# Altium PCB superhet1.PcbDoc (part 2 of 5)
Units mm, origin at the board's own origin, x right, y up, seen from the top; angles counter-clockwise.
Board outline 77 x 100 mm, 4 copper layers (Top Layer, Internal Plane 1, Signal Layer 1, Bottom Layer), stack 0.778 mm thick; 440 components, 348 nets, 1672 pads, 2403 vias.
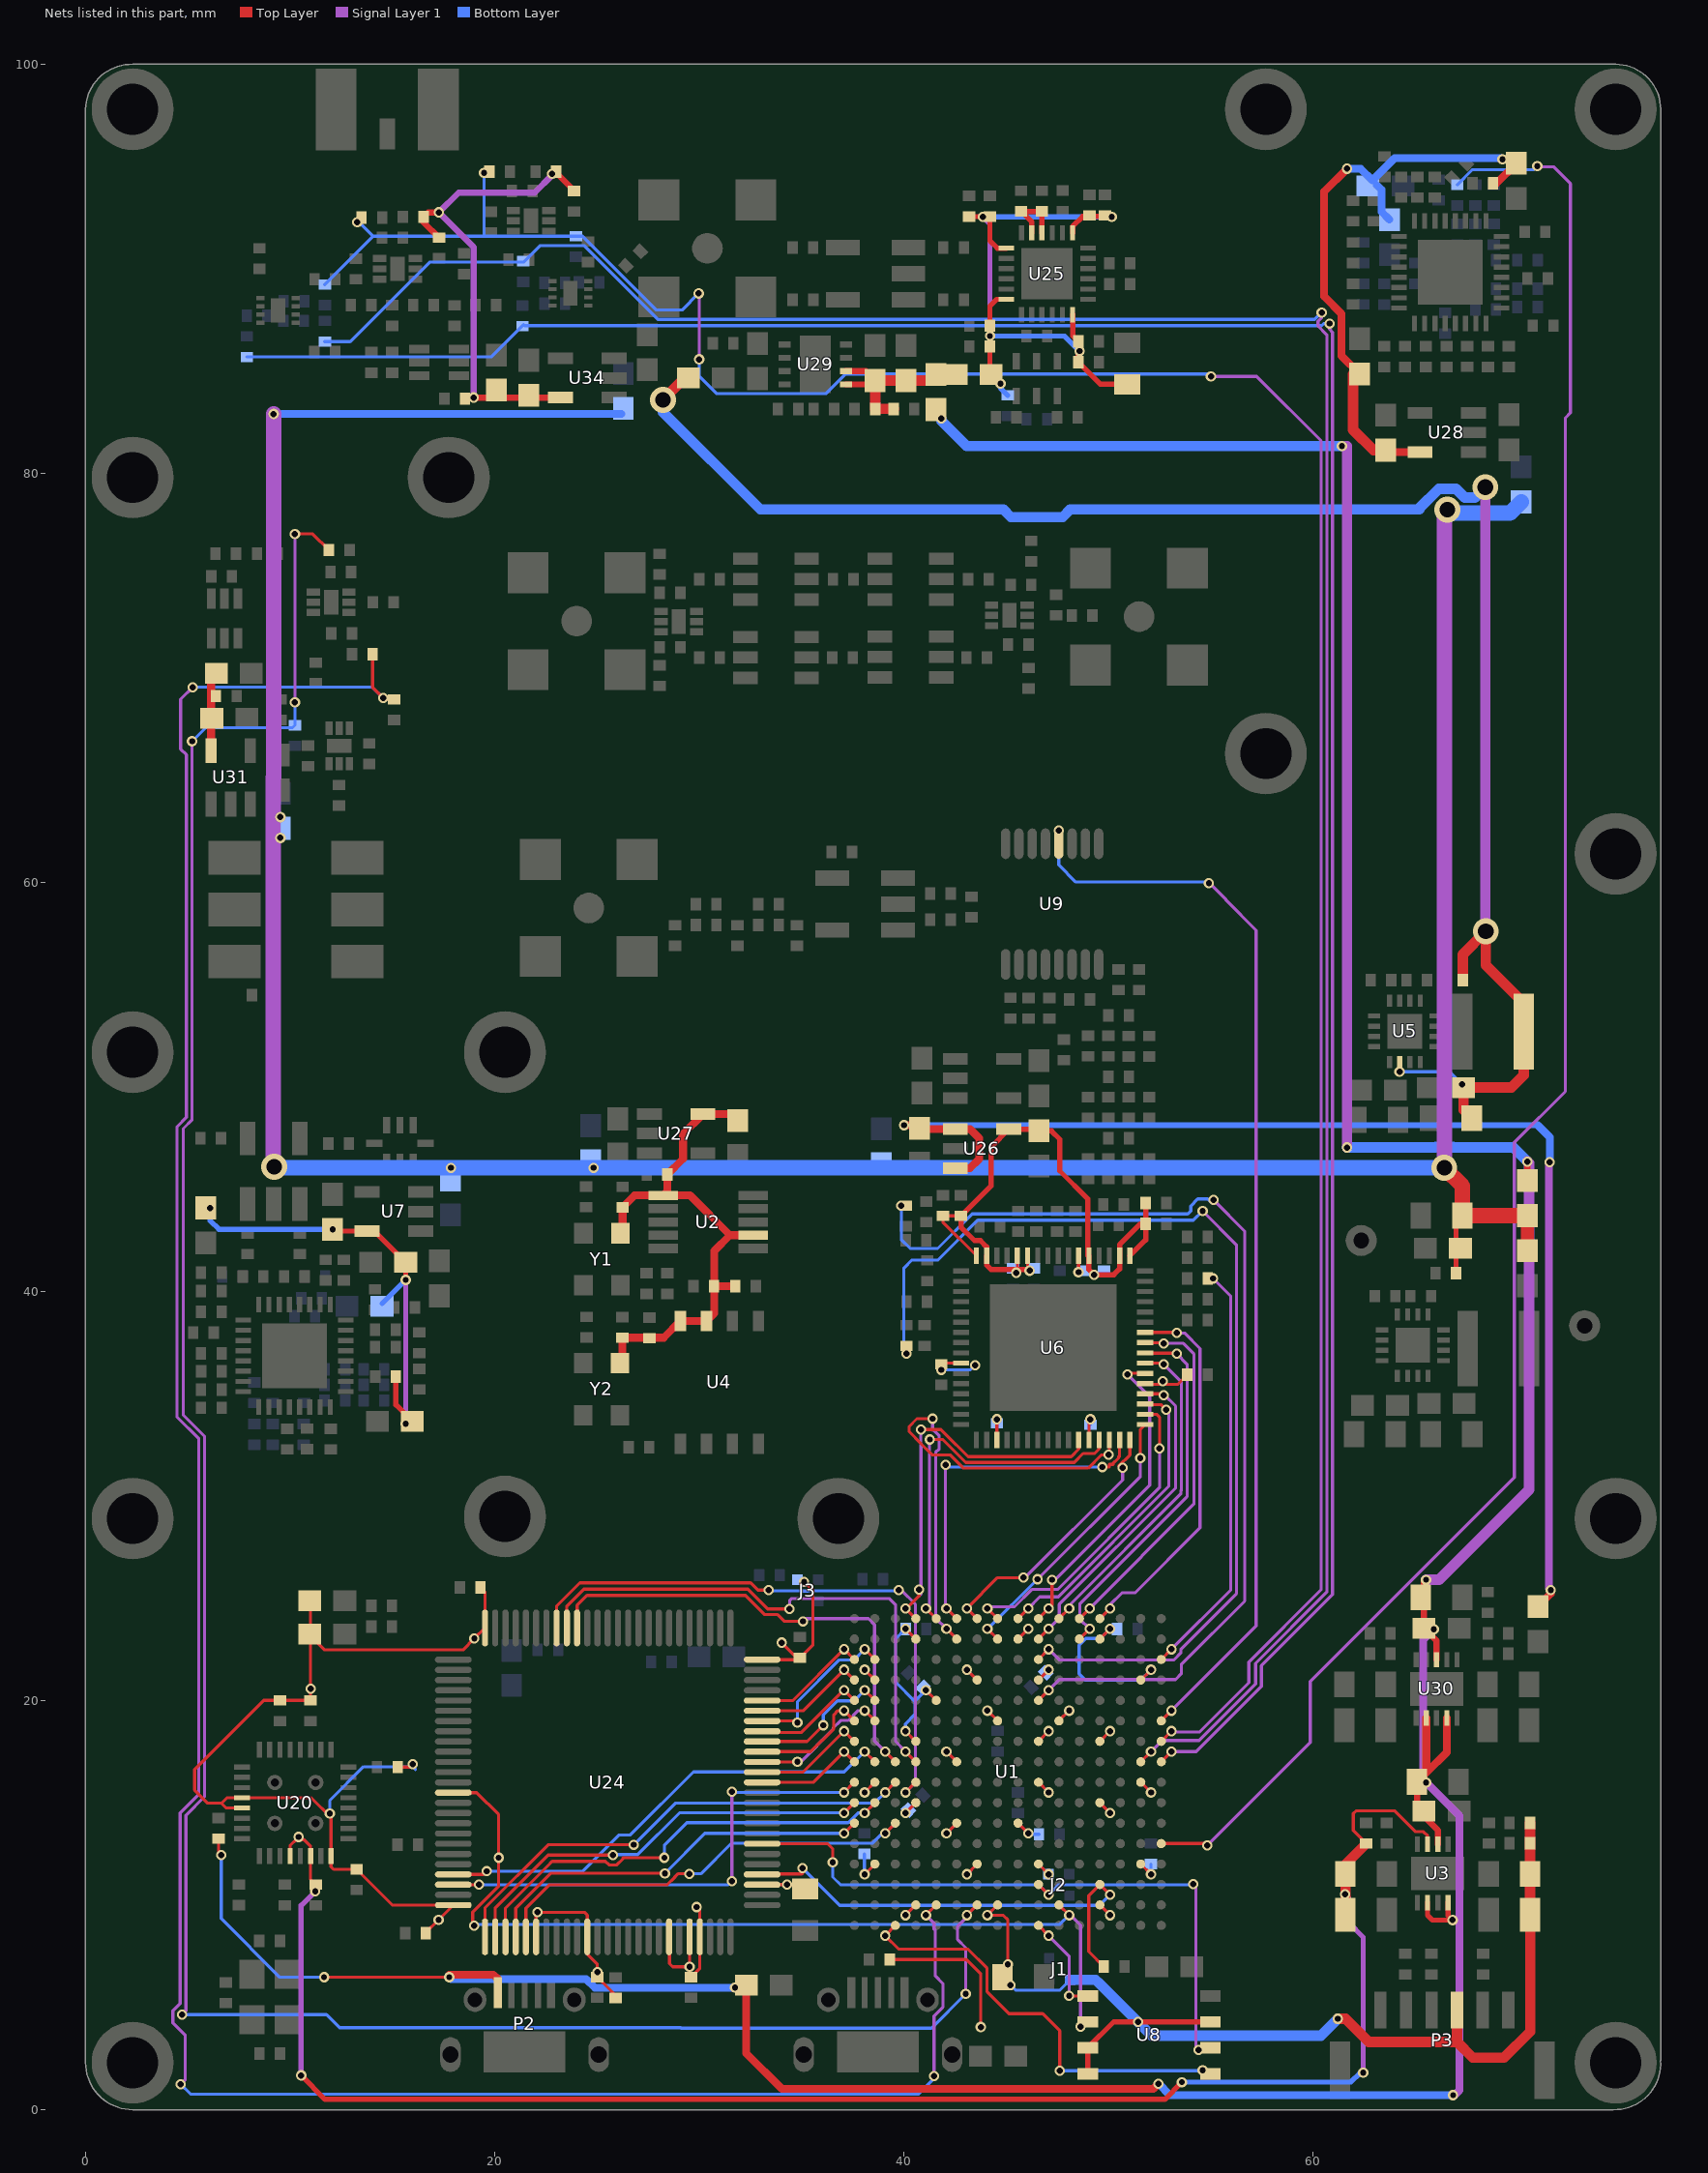
[diagram p4: the nets of this part, all layers, seen from the top]

## Via types
v1: diameter 0.508, hole 0.305, Top Layer to Bottom Layer, 1419 vias
v2: diameter 0.508, hole 0.305, Top Layer to Bottom Layer, tented both sides, 723 vias
v3: diameter 0.5, hole 0.3, Top Layer to Bottom Layer, tented both sides, 254 vias
v4: diameter 1.27, hole 0.762, Top Layer to Bottom Layer, tented both sides, 6 vias
v5: diameter 1.27, hole 0.711, Top Layer to Bottom Layer, tented both sides, 1 vias

## Nets (pads, with @x,y where several pads share a name; then routed paths per layer and width w, separated by ;. In a path a pad name is that pad's centre, name@x,y a point inside that pad or via, vN(x,y) a via of type N, cw(c..) or ccw(c..) an arc to the next point about the centre after c; other vN are vias at no path point) (continued)
1.8: C27.1 C54.2 L17.2 R11.2 U3.4 U20.28 U20.30 | length 85.4
  Top Layer w0.152: U20.28@10,12.4 10,12.921 10.287,13.208 v3@10.414,13.208 ; v3(10.414,13.335) v3@10.414,13.208 ; C27.1@11.25,11 11,11.25 U20.30@11,12.4 11,12.876 10.668,13.208 v3@10.414,13.208 ; R11.2@62.606,13.017 61.976,13.647 61.976,14.478 62.103,14.605 64.008,14.605 65.024,13.589 65.405,13.589 65.605,13.389 U3.4@65.605,12.976
  Top Layer w0.254: v2(10.541,1.676) 11.709,0.508 52.756,0.508 v3(53.594,1.346)
  Top Layer w0.508: L17.2@61.59,9.525 C54.2@61.59,11.525 61.59,12.001 R11.2@62.606,13.017
  Signal Layer 1 w0.254: v2(10.541,1.676) 10.541,9.982 v3(11.227,10.668) ; v3(61.57,10.541) 61.747,10.363 61.747,9.141 62.459,8.43 v3(62.459,1.803)
  Bottom Layer w0.254: v3(53.594,1.346) 61.849,1.346 62.306,1.803 v3(62.459,1.803)
1.8ADC: C34.1 C48.1 C50.1 C57.1 C58.1 C60.1 C62.1 C63.1 C176.2 U6.49 U6.50 U6.53 U6.54 U6.59 U6.60 U6.63 U6.64 U26.5 | length 33.3
  Top Layer w0.152: C50.1@42.799,43.696 C34.1@41.91,43.696 41.91,43.39 U6.64@43.55,41.75 ; U6.63@44.05,41.75 44.05,42.183 ; v2(45.491,40.919) 45.491,41.013 45.55,41.072 U6.60@45.55,41.75 ; v2@46.05,41.072 U6.59@46.05,41.75 ; v2(48.539,40.945) 48.55,40.955 U6.54@48.55,41.75
  Top Layer w0.254: U6.63@44.05,41.75 44.05,41.294 44.272,41.072 45.55,41.072 v2@46.05,41.072 ; 44.05,42.183 43.739,42.494 43.459,42.494 42.799,43.155 C50.1@42.799,43.696 44.272,45.169 44.272,47.076 U26.5@45.136,47.94 C176.2@46.523,47.94 ; C176.2@46.609,47.854 47.219,47.854 47.625,47.447 47.625,45.898 48.992,44.531 48.992,41.75 U6.53@49.05,41.75 49.05,41.069 v2(49.301,40.818) 50.267,40.818 50.55,41.101 U6.50@50.55,41.75 50.55,42.295 51.562,43.307 C63.1@51.824,43.307 ; U6.49@51.05,41.75 51.824,42.524 C63.1@51.824,43.307 ; C48.1@51.824,44.323 C63.1@51.824,43.307
  other v2: 46.152,41.021
2.2: C179.2 R7.1 U26.1 U26.3 | length 61.4
  Top Layer w0.381: v3(40.005,48.133) 40.615,48.133 C179.2@40.767,47.981 40.808,47.94 U26.1@42.515,47.94 43.246,47.94 43.688,47.498 43.688,46.482 43.231,46.025 U26.3@42.515,46.025 ; R7.1@70.993,24.599 71.628,25.234 v3(71.628,25.4)
  Signal Layer 1 w0.381: v3@71.539,46.33 71.539,25.489 v3(71.628,25.4)
  Bottom Layer w0.305: v3(40.005,48.133) 70.993,48.133
  Bottom Layer w0.381: 70.993,48.133 71.577,47.549 v3(71.577,46.33)
3.3CLOCK: C24.1 C29.2 C30.2 C52.2 C177.2 R5.1 R6.1 U2.1 U2.7 U4.7 U4.8 U27.5 Y1.4 Y2.4 | length 26.8
  Top Layer w0.381: Y2.4@26.13,36.501 26.25,36.621 C29.2@26.25,37.742 28.265,37.742 U4.8@29.083,38.56 U4.7@30.353,38.56 30.726,38.933 R5.1@30.726,40.259 ; Y1.4@26.138,42.851 26.254,42.967 C52.2@26.254,44.116 26.842,44.704 U2.1@28.239,44.704 ; R6.1@31.758,40.259 R5.1@30.726,40.259 ; C177.2@31.877,48.362 31.565,48.674 U27.5@30.182,48.674 29.21,47.702 29.21,46.49 C24.1@28.44,45.72 28.44,44.905 U2.1@28.239,44.704 ; U2.7@32.639,42.754 31.502,42.754 ; U2.1@28.239,44.704 29.552,44.704 31.502,42.754 ; R5.1@30.726,40.259 30.726,41.978 31.502,42.754
3.3D: C4.2 C5.2 C6.2 C7.2 C10.2 C13.1 C14.1 C15.2 C16.2 C17.1 C18.1 C21.1 C22.1 C25.2 C56.2 C64.1 C65.1 C68.2 C69.1 C73.1 C109.1 J1.1 J2.1 J3.1 L18.2 LED1.1 LED2.1 P3.4 R1.2 R4.2 R23.2 R24.2 R25.2 R44.1 R45.2@46.609,13.462 U1.B4 U1.B9 U1.B13 U1.D2 U1.D7 U1.D10 U1.D15 U1.E5 U1.F8 U1.F11 U1.G4 U1.G10 U1.G13 U1.H6 U1.J2 U1.J10 U1.J15 U1.K4 U1.K13 U1.L6 U1.L9 U1.N2 U1.N7 U1.N10 U1.N15 U1.R4 U1.R8 U1.R13 U6.10 U6.19 U6.28 U6.37 U8.3 U8.7 U8.8 U20.20 U20.21 U20.32 U24.6 U24.11 U24.19 U24.21 U24.22 U24.28 U24.50 U24.75 U24.100 | length 179.7
  Top Layer w0.152: U20.21@7.65,14.75 6.88,14.75 6.644,14.986 ; LED1.1@10.961,24.892 11,24.853 LED2.1@11,23.163 ; v3(11.938,14.478) 12,14.416 v3@12,14.289 ; R25.2@15.258,16.75 15.861,16.75 v3(16.002,16.891) ; C6.2@16.637,8.636 16.637,8.662 v3(17.259,9.284) U24.100@17.977,10.002 14.998,10.002 C109.1@13.25,11.75 12.126,11.75 12,11.876 U20.32@12,12.4 v3@12,14.289 ; C10.2@19.304,25.527 19.527,25.304 U24.75@19.527,23.552 v3(19.006,23.031) 18.454,22.479 11.684,22.479 LED2.1@11,23.163 ; U24.6@22.027,8.452 22.027,9.581 v3(22.098,9.652) 24.384,9.652 24.527,9.509 U24.11@24.527,8.452 24.527,7.604 25.019,7.112 v3(25.019,6.731) C5.2@25.019,6.477 ; C5.2@25.019,6.477 25.508,5.986 25.908,5.588 R4.2@25.908,5.461 ; U24.19@28.527,8.452 28.546,8.433 28.546,7.141 28.702,6.985 v3(29.527,6.985) ; U24.21@29.527,8.452 v3(29.527,6.985) ; v3(29.87,9.906) 29.87,9.864 30.027,9.707 U24.22@30.027,8.452 30.027,6.913 C25.2@29.591,6.477 29.527,6.541 v3(29.527,6.985) ; U24.28@33.077,11.002 v3(34.29,11.002) 34.972,11.002 C16.2@35.179,10.795 ; U24.50@33.077,22.002 34.829,22.002 C4.2@34.925,22.098 ; v2(34.036,22.835) 34.773,22.098 C4.2@34.925,22.098 ; v3(35.128,25.806) 35.56,25.375 35.56,22.733 C4.2@34.925,22.098 ; v2(38.085,11.51) U1.N2@38.585,12.01 ; v2(38.085,15.51) U1.J2@38.585,16.01 ; v2(38.085,21.51) U1.D2@38.585,21.01 ; R44.1@39.311,7.341 43.053,7.341 43.764,6.629 v2(43.764,4.039) ; v2(40.085,9.51) U1.R4@40.585,10.01 ; v2(40.085,14.51) U1.K4@40.585,15.01 ; v2(40.085,18.51) U1.G4@40.585,18.01 ; v2(40.085,23.51) U1.B4@40.585,23.01 ; v2(41.085,20.51) U1.E5@41.585,20.01 ; v2(41.834,36.17) C65.1@41.834,36.441 ; C65.1@41.893,36.5 U6.10@42.8,36.5 ; v2(42.085,13.51) U1.L6@42.585,14.01 ; v2(42.085,17.51) U1.H6@42.585,17.01 ; v2(43.085,11.51) U1.N7@43.585,12.01 ; v2(43.085,21.51) U1.D7@43.585,21.01 ; v2(44.085,19.51) U1.F8@44.585,19.01 ; U6.19@44.55,32.75 v2@44.55,33.755 ; v2(44.552,33.757) v2@44.577,33.782 ; U1.R8@44.585,10.01 v2(44.085,9.51) 44.846,9.51 45.085,9.271 v3(45.085,7.112) 45.085,6.731 C15.2@44.831,6.477 ; U1.L9@45.585,14.01 v2(46.085,13.51) ; U1.B9@45.585,23.01 v2(46.085,23.51) ; U1.N10@46.585,12.01 v2(47.085,11.51) ; U1.J10@46.585,16.01 v2(47.085,15.51) ; U1.G10@46.585,18.01 v2(47.085,18.51) ; U1.D10@46.585,21.01 v2(47.085,21.51) ; U1.F11@47.585,19.01 v2(48.085,19.51) ; U6.28@49.05,32.75 v2@49.05,33.683 ; v2(49.124,33.757) v2@49.124,33.807 ; U1.R13@49.585,10.01 v2(50.085,9.51) ; U1.K13@49.585,15.01 v2(50.085,14.51) ; U1.G13@49.585,18.01 v2(50.085,18.51) ; U1.B13@49.585,23.01 v2(50.085,23.51) ; U1.N15@51.585,12.01 v2(52.085,11.51) ; U1.J15@51.585,16.01 v2(52.085,15.51) ; U1.D15@51.585,21.01 v2(52.085,21.51) ; U6.37@51.8,35.5 51.8,35.462 v2@52.654,35.462 ; v2(52.654,35.611) v2@52.654,35.462 ; C64.1@53.856,35.941 53.856,35.921 53.398,35.462 v2@52.654,35.462 ; 6.644,14.986 5.969,14.986 5.334,15.621 5.334,16.637 8.705,20.008 R23.2@9.5,20.008 R24.2@11,20.008 v3(11,20.574) LED2.1@11,23.163 ; 6.644,14.986 6.908,15.25 U20.20@7.65,15.25 11.039,15.25 v3@12,14.289
  Top Layer w0.254: U8.8@48.994,1.753 U8.7@48.994,3.023 50.264,4.293 v3(51.46,4.293) U8.3@54.994,4.293
  Top Layer w0.508: v3(61.214,4.445) 61.595,4.445 62.728,3.312 67.046,3.312 ; P3.4@67.046,4.879 67.046,3.312 ; C7.2@70.614,14.025 R1.2@70.614,13.025 70.614,9.533 L18.2@70.622,9.525 70.622,3.82 69.342,2.54 67.818,2.54 67.046,3.312
  Bottom Layer w0.152: v3(11.938,14.478) 11.938,15.113 13.589,16.764 v3@16.002,16.764 ; v3(16.002,16.891) v3@16.002,16.764 ; 16.129,16.637 v3@16.002,16.764 ; v2@38.075,11.52 C14.1@38.075,12.505 ; v2(40.085,18.51) 40.085,18.863 40.542,19.321 40.542,19.967 ; v2(40.085,23.51) 39.599,23.024 39.599,20.911 40.542,19.967 ; v2(41.085,20.51) 40.542,19.967 ; v2(41.834,36.17) 43.256,36.17 v2(43.485,36.398) ; C73.1@44.552,33.561 v2(44.552,33.757) v2@44.552,33.833 ; v3(45.212,6.096) 45.466,5.842 47.625,5.842 J1.1@48.133,6.35 ; v2(46.085,13.51) 46.133,13.462 R45.2@46.609,13.462 ; C69.1@49.124,33.485 v2(49.124,33.757) v2@49.124,33.807 ; 49.305,6.35 49.5,6.155 49.536,6.191 49.568,6.223 ; v2(50.085,23.51) 49.613,23.038 48.895,23.038 48.565,22.708 48.565,21.311 48.87,21.006 51.581,21.006 v2(52.085,21.51) ; v2(52.085,11.51) C22.1@52.085,12.01
  Bottom Layer w0.508: J1.1@48.133,6.35 49.305,6.35 49.378,6.35 49.536,6.191 52.113,3.615 60.384,3.615 v3(61.214,4.445)
3.3FE: C32.2 C165.2 C182.2 C220.2 L3.2 L8.2 L16.1 U34.5 | length 23.9
  Top Layer w0.305: C165.2@16.52,92.54 16.52,92.286 L8.2@17.282,91.524 ; C165.2@16.741,92.761 v2(17.272,92.761) ; C32.2@18.552,83.65 cw(c18.692,83.51) 18.692,83.708 v2(18.974,83.708) U34.5@23.216,83.708 ; C182.2@23.008,94.75 23.008,94.688 L3.2@23.886,93.81
  Signal Layer 1 w0.305: v2(18.974,83.708) 18.974,91.059 v2(17.272,92.761) 18.237,93.726 21.946,93.726 22.809,94.59 v2(22.809,94.64)
3.3IF1: C154.2 C192.2 L6.1 U31.5 | length 3.5
  Top Layer w0.381: U31.5@6.137,66.446 L6.1@6.137,69.979
3.3LO1: C178.2 FB3.2 FB4.1 FB5.2 FB7.1 R30.2 U28.5 | length 29.4
  Top Layer w0.381: v2(61.671,94.894) 60.554,93.777 60.554,88.646 61.392,87.808 61.392,85.75 FB3.2@62.281,84.861 ; C178.2@63.383,81.046 U28.5@65.233,81.046 ; R30.2@68.949,94.158 FB4.1@69.952,95.16
  Top Layer w0.508: FB3.2@61.962,84.849 61.962,82.132 62.962,81.132 C178.2@63.554,81.132
  Bottom Layer w0.381: v2(61.671,94.894) 62.331,94.894 62.901,94.324 63.993,95.415 v2@69.202,95.415 ; FB5.2@63.13,94.095 63.348,93.878 63.348,92.797 FB7.1@63.74,92.405
  other v2: 69.266,95.352
3.3LO2: C45.2 FB1.2 FB2.1 FB6.2 FB8.1 R86.2 U7.5 | length 23.1
  Top Layer w0.254: v2(12.081,43.039) 12.167,42.953 U7.5@13.76,42.953 14.125,42.953 FB6.2@15.651,41.427 v2(15.651,40.568) ; R86.2@15.168,35.839 15.168,34.464 FB1.2@15.977,33.655
  Signal Layer 1 w0.254: v2(15.651,33.532) v2(15.651,40.568)
  Bottom Layer w0.254: v2(6.096,44.069) 6.096,43.459 6.516,43.039 v2(12.081,43.039) ; FB8.1@14.494,39.411 v2(15.651,40.568)
4.2V: C216.2 C217.2 R2.1 R124.1 R125.2 R126.1 R127.1 R128.1 R129.1 R130.1 R131.1 | length 157.4
  Top Layer w0.254: R2.1@66.997,40.894 C217.2@66.997,43.401
  Top Layer w0.635: R124.1@70.485,41.998 R125.2@70.485,43.713
  Top Layer w0.762: v4(66.421,46.05) 67.31,45.161 C217.2@67.31,43.713 R125.2@70.485,43.713
  Signal Layer 1 w0.508: 9.169,65.126 9.195,65.151 ; v4@66.421,78.359 v4@66.472,78.41
  Signal Layer 1 w0.762: v4@9.169,45.949 9.169,65.126 ; 9.195,65.151 v2(9.195,82.906) ; v4(66.421,46.05) v4@66.421,78.359
  Bottom Layer w0.381: v2(9.195,82.906) R131.1@26.187,82.906
  Bottom Layer w0.508: v4@9.169,45.949 v4@9.271,46.05
  Bottom Layer w0.762: v4@9.271,46.05 v3(17.856,46.05) v3(24.841,46.05) v4(66.421,46.05) ; v4@66.751,78.054 69.633,78.054 R130.1@70.18,78.601
  other v2: 9.525,62.179 9.525,63.195
  other v4: 9.22,46.101 66.573,78.232
5V: C53.2 C55.2 C187.2 C188.2 P2.1 R46.1 R60.1 R83.1 R125.1 U3.3 U3.7 U3.9 U30.3 U30.7 U30.9 | length 201.2
  Top Layer w0.152: R60.1@6.5,13.25 6.5,12.469 6.523,12.446 v3(6.629,12.446) ; v3(11.659,6.477) v3(17.78,6.477) ; P2.1@20.163,5.723 P2.1@20.163,6.38
  Top Layer w0.254: U3.7@65.605,10.125 65.605,9.503 65.837,9.271 v2(66.827,9.271) 66.605,9.493 U3.9@66.605,10.125
  Top Layer w0.305: C53.2@65.09,16.025 65.09,14.677 66.105,13.662 U3.3@66.105,12.976 ; C188.2@65.279,25.046 C188.2@65.431,24.894 ; v3(65.532,25.908) 65.431,25.807 C188.2@65.431,24.894 ; U30.3@66.044,21.997 66.044,22.933 C187.2@65.431,23.546 C188.2@65.431,24.894 ; R125.1@70.485,45.427 v3(70.485,46.355)
  Top Layer w0.381: v3(17.78,6.477) 17.78,6.604 19.939,6.604 P2.1@20.163,6.38 ; R46.1@32.297,6.096 32.297,2.755 34.036,1.016 52.197,1.016 v3(52.451,1.27) ; C53.2@65.09,16.025 C53.2@65.544,16.479 ; U30.7@65.544,19.146 C53.2@65.544,16.479 ; U30.9@66.544,19.146 66.544,17.479 C53.2@65.544,16.479
  Signal Layer 1 w0.381: v3(65.913,23.495) 65.38,22.962 65.38,16.154 v3(65.532,16.002) 67.158,14.376 67.158,0.94 v3@66.929,0.711
  Signal Layer 1 w0.508: v2(61.671,47.041) 61.671,81.331 ; v3(65.532,25.908) 66.167,25.908 70.561,30.302 70.561,46.279 v3(70.485,46.355)
  Bottom Layer w0.152: v3(6.629,12.446) 6.629,9.347 9.5,6.477 v3(11.659,6.477)
  Bottom Layer w0.381: v3(17.78,6.477) 17.865,6.392 24.469,6.392 24.892,5.969 v3(31.75,5.969) ; v3(52.451,1.27) 53.01,0.711 v3(66.853,0.711)
  Bottom Layer w0.508: v2(41.834,82.677) 41.834,82.575 43.078,81.331 v2(61.417,81.331) ; v2(61.671,47.041) 65.975,47.041 66,47.066 66.842,47.066 66.867,47.041 69.799,47.041 v3(70.485,46.355)
5V-A: C2.1 C8.2 C9.2 R8.1 R80.1 R83.2 U29.1 U29.2 | length 7.9
  Top Layer w0.305: U29.1@37.175,84.35 C9.2@38.414,84.35 ; U29.2@37.175,85 C9.2@38.136,85
  Top Layer w0.508: C2.1@39.505,83.15 R8.1@38.6,83.15 C9.2@38.6,84.536 C8.2@40.1,84.536 41.255,84.536 R83.2@41.783,85.065
5V-MIXER: C118.2 C119.2 C120.2 C121.2 C122.2 C123.2 C124.2 C125.2 C126.2 R78.1 R80.2 U25.7 U25.13 U25.18 U25.24 | length 33
  Top Layer w0.254: C121.2@43.195,92.555 C125.2@44.211,92.555 44.211,91.374 44.574,91.011 U25.13@45.005,91.011 ; R80.2@44.211,84.897 C119.2@44.211,86.205 v3(44.211,86.716) C123.2@44.211,87.221 44.211,88.178 44.544,88.511 U25.18@45.005,88.511 ; R80.2@44.272,84.836 v3(44.729,84.379) ; U25.24@48.255,87.761 48.255,86.733 C122.2@48.529,86.459 C118.2@48.529,85.443 49.619,84.353 C126.2@50.927,84.353 ; U25.7@48.255,91.761 48.255,92.07 48.744,92.559 C120.2@49.791,92.559
  Signal Layer 1 w0.254: v3(43.866,92.532) 44.211,92.187 v3(44.211,86.716)
  Bottom Layer w0.254: v3(43.866,92.532) v3(50.165,92.532) ; v3(44.211,86.716) 47.854,86.716 v3(48.59,85.979) ; v3(44.729,84.379) 44.729,84.168 R78.1@45.085,83.812
6V: C37.2 C38.2 L12.2 R15.1 R82.2 U5.14 | length 85.8
  Top Layer w0.152: v2(64.237,50.749) 64.237,50.692 64.246,50.682 U5.14@64.246,51.223
  Top Layer w0.508: v4(28.219,83.591) R82.2@29.164,84.536 ; R15.1@67.326,55.223 67.326,56.48 v4(68.453,57.607) 68.453,55.956 70.31,54.099 L12.2@70.31,52.705 70.31,50.574 69.709,49.973 C37.2@67.36,49.973 67.36,48.875 C38.2@67.762,48.473
  Signal Layer 1 w0.508: v4@68.428,58.166 v4(68.428,79.324)
  Bottom Layer w0.152: v2(64.237,50.749) 66.675,50.749 v2(67.285,50.14)
  Bottom Layer w0.508: v4(28.219,83.591) 28.219,83.007 32.995,78.232 44.87,78.232 45.237,77.865 47.763,77.865 48.13,78.232 65.2,78.232 65.2,78.295 66.153,79.248 66.994,79.248 67.426,78.816 67.92,78.816 v4(68.428,79.324)
ADC_CLK_FPGA_N: C173.1 U1.C10 | length 51
  Top Layer w0.152: U1.C10@46.585,22.01 v2(47.085,22.51)
  Signal Layer 1 w0.152: v2(47.085,22.51) 47.602,21.993 53.214,21.993 53.542,22.321 53.542,22.503 56.261,25.222 56.261,42.291 v3(54.61,43.942)
  Bottom Layer w0.152: v3(40.132,36.957) 40.005,37.084 40.005,41.148 40.394,41.537 41.664,41.537 43.612,43.485 54.153,43.485 v3(54.61,43.942)
ADC_CLK_FPGA_P: C172.1 U1.E10 | length 51
  Top Layer w0.152: U1.E10@46.585,20.01 v2(47.085,20.51)
  Signal Layer 1 w0.152: v2(47.085,20.51) 47.602,21.027 53.285,21.027 53.564,21.307 53.564,21.764 56.667,24.867 56.667,42.951 v3(55.143,44.475)
  Bottom Layer w0.152: v3(39.878,44.196) 39.878,42.545 40.319,42.104 41.656,42.104 43.342,43.79 53.883,43.79 54.03,43.937 54.03,44.182 54.37,44.522 54.85,44.522 55.02,44.352 v3(55.143,44.475)
ADC_DATA_A0: U1.A4 U6.27 | length 18.9
  Top Layer w0.152: U1.A4@40.585,24.01 v2(40.085,24.51) 40.131,24.51 40.742,25.121 v3(40.742,25.425) ; v3(40.843,33.249) 41.808,33.249 42.012,33.045 42.026,33.045 43.143,31.928 48.184,31.928 48.55,32.294 U6.27@48.55,32.75
  Signal Layer 1 w0.152: 40.767,25.146 40.843,25.222 40.843,32.557 40.822,32.578 40.822,33.081 40.843,33.102 v3(40.843,33.249)
ADC_DATA_A1: U1.A5 U6.29 | length 18.5
  Top Layer w0.152: v2(41.085,24.51) U1.A5@41.585,24.01 ; v3(41.275,32.766) 41.91,32.766 43.028,31.648 48.335,31.648 48.767,32.08 49.327,32.08 49.55,32.303 U6.29@49.55,32.75
  Signal Layer 1 w0.152: v2(41.085,24.51) 41.25,24.675 v3@41.25,32.766
ADC_DATA_A2: U1.B6 U6.30 | length 24.7
  Top Layer w0.152: v3(41.402,33.782) 40.64,33.782 40.259,33.401 40.259,33.147 40.822,32.584 40.822,32.578 41.087,32.313 41.093,32.313 41.402,32.004 42.277,32.004 42.912,31.369 49.011,31.369 49.646,32.004 v3@50.038,32.004 ; v2(42.085,23.51) U1.B6@42.585,23.01 ; v3(50.013,32.029) 50.14,32.029 50.165,32.004 50.102,32.067 50.05,32.119 U6.30@50.05,32.75
  Signal Layer 1 w0.152: v3(41.402,33.782) 41.402,33.219 41.463,33.219 41.728,32.954 41.728,32.305 41.554,32.131 41.554,24.041 v2(42.085,23.51)
ADC_DATA_A3: U1.A6 U6.31 | length 17.5
  Top Layer w0.152: v2(42.085,24.51) U1.A6@42.585,24.01 ; v3(49.708,31.42) 50.042,31.42 50.042,31.551 50.226,31.551 50.233,31.558 50.233,31.586 50.491,31.844 50.491,31.924 50.55,31.924 U6.31@50.55,32.75
  Signal Layer 1 w0.152: v3(42.037,31.521) 42.037,24.558 v2(42.085,24.51)
  Bottom Layer w0.152: v3(42.037,31.521) 42.139,31.42 v3(49.708,31.42)
ADC_DATA_A4: U1.A7 U6.32 | length 13.2
  Top Layer w0.152: U1.A7@43.585,24.01 v2(43.085,24.51) 44.585,26.01 v3(45.847,26.01) ; v3(50.693,31.377) 50.606,31.377 50.513,31.471 51.05,32.008 U6.32@51.05,32.75
  Signal Layer 1 w0.152: v3(45.847,26.01) 45.923,26.01 50.693,30.779 v3(50.693,31.377)
ADC_DATA_A5: U1.B8 U6.33 | length 13.9
  Top Layer w0.152: v2(44.085,23.51) U1.B8@44.585,23.01 ; v3(51.562,31.852) 51.562,33.262 U6.33@51.8,33.5
  Signal Layer 1 w0.152: v3(46.533,25.933) 51.562,30.963 v3(51.562,31.852)
  Bottom Layer w0.152: v2@44.109,23.51 v3(46.533,25.933)
ADC_DATA_A6: U1.A8 U6.34 | length 15.8
  Top Layer w0.152: v2(44.085,24.51) U1.A8@44.585,24.01 ; U6.34@51.8,34 52.36,34 52.502,33.858 v3(52.502,32.334)
  Signal Layer 1 w0.152: v2(44.085,24.51) 44.162,24.587 45.415,24.587 46.26,25.432 47.516,25.432 52.502,30.418 v3(52.502,32.334)
ADC_DATA_A7: U1.A9 U6.35 | length 15
  Top Layer w0.152: U1.A9@45.585,24.01 v2(46.085,24.51) ; U6.35@51.8,34.5 51.8,34.472 52.574,34.472 v3(52.832,34.214)
  Signal Layer 1 w0.152: v2(46.085,24.51) 46.645,25.07 47.549,25.07 52.955,30.476 52.955,34.091 v3(52.832,34.214)
ADC_DATA_A8: U1.B10 U6.36 | length 16
  Top Layer w0.152: U1.B10@46.585,23.01 v2(47.085,23.51) ; U6.36@51.8,35 52.653,35 52.705,35.052 v3(52.705,34.925)
  Signal Layer 1 w0.152: v2(47.085,23.51) 47.602,24.027 47.602,24.71 53.285,30.393 53.285,34.402 52.762,34.925 v3(52.705,34.925)
ADC_DATA_A9: U1.A10 U6.38 | length 15.7
  Top Layer w0.152: U1.A10@46.585,24.01 v2(47.085,24.51) 47.244,24.669 v3(47.244,25.908) ; v3(50.927,35.941) 50.986,36 U6.38@51.8,36
  Signal Layer 1 w0.152: v3(47.244,25.908) 47.244,25.832 47.32,25.832 52.019,30.531 52.019,34.849 v3(50.927,35.941)
ADC_DATA_A10: U1.A11 U6.39 | length 16.2
  Top Layer w0.152: U1.A11@47.585,24.01 v2(48.085,24.51) ; U6.39@51.8,36.5 52.654,36.5 v3(52.705,36.449)
  Signal Layer 1 w0.152: v2(48.085,24.51) 48.085,24.64 53.543,30.098 53.543,30.256 53.565,30.277 53.565,35.589 v3(52.705,36.449)
ADC_DATA_A11: U1.B12 U6.40 | length 18.3
  Top Layer w0.152: U1.B12@48.585,23.01 v2(49.085,23.51) ; U6.40@51.8,37 51.8,36.986 53.311,36.986 v3(53.34,36.957)
  Signal Layer 1 w0.152: v2(49.085,23.51) 48.602,23.993 48.602,24.726 53.848,29.972 53.848,36.449 v3(53.34,36.957)
ADC_DATA_A12: U1.A12 U6.41 | length 17.9
  Top Layer w0.152: U1.A12@48.585,24.01 v2(49.085,24.51) ; U6.41@51.8,37.5 52.67,37.5 v3(52.705,37.465)
  Signal Layer 1 w0.152: v2(49.085,24.51) 54.178,29.603 54.178,36.957 53.67,37.465 v3(52.705,37.465)
ADC_DATA_A13: U1.A13 U6.42 | length 18.6
  Top Layer w0.152: U1.A13@49.585,24.01 v2(50.085,24.51) ; U6.42@51.8,38 53.313,38 v3(53.34,37.973)
  Signal Layer 1 w0.152: v2(50.085,24.51) 50.085,24.685 50.673,25.273 51.308,25.273 54.483,28.448 54.483,37.211 53.721,37.973 v3(53.34,37.973)
AMP_IF: R91.1 R92.1 U1.R5 | length 129.2
  Top Layer w0.152: R91.1@14.031,71.158 14.031,69.535 v3(14.554,69.012) 14.613,68.953 R92.1@15.088,68.953 ; v2(41.085,9.51) U1.R5@41.585,10.01
  Signal Layer 1 w0.152: v3(4.648,1.245) 4.877,1.473 4.877,3.63 4.271,4.236 4.271,4.836 4.623,5.188 4.623,14.504 5.537,15.418 5.537,32.803 4.47,33.869 4.47,48.057 4.928,48.514 4.928,66.243 4.648,66.523 4.648,68.961 v3(5.232,69.545) ; v2(41.085,9.51) 41.478,9.117 41.478,8.827 41.542,8.763 41.542,6.541 41.913,6.17 41.913,5.011 41.478,4.576 v3(41.478,1.651)
  Bottom Layer w0.152: v3(4.648,1.245) 5.131,0.762 40.716,0.762 41.504,1.549 41.478,1.575 v3(41.478,1.651) ; v3(5.232,69.545) 14.021,69.545 v3(14.554,69.012)
BYP_IF: R93.1 R94.1 U1.R7 | length 124
  Top Layer w0.152: v2(10.236,77.038) 11.108,77.038 R93.1@11.895,76.251 ; v2(43.085,9.51) U1.R7@43.585,10.01
  Signal Layer 1 w0.152: v3(4.724,4.648) v3@4.75,4.674 ; 4.902,4.826 4.902,14.388 5.817,15.303 5.817,32.918 4.775,33.96 4.775,47.967 5.207,48.399 v2(5.207,66.904) ; v2(10.236,68.809) v2(10.236,77.038) ; v3(43.028,5.664) 43.028,7.921 42.628,8.321 42.628,8.967 43.085,9.424 v2(43.085,9.51)
  Bottom Layer w0.152: v3(4.724,4.648) 11.78,4.648 12.417,4.011 29.085,4.011 29.108,3.988 41.351,3.988 v3(43.028,5.664) ; v2(5.207,66.904) 5.867,67.564 10.117,67.564 R94.1@10.236,67.683 v2(10.236,68.809)
CCLK: U1.R11 U8.6 U24.89 | length 44.4
  Top Layer w0.152: U24.89@17.977,15.502 19.118,15.502 20.193,14.427 v3(20.193,12.319) 20.193,10.936 18.923,9.666 18.923,8.992 v3(18.999,8.992) ; U1.R11@47.585,10.01 v2(48.085,9.51)
  Signal Layer 1 w0.152: v2(48.085,9.51) 48.148,9.51 48.641,9.017 v2(48.641,4.064)
  Bottom Layer w0.152: v3@18.999,9.053 47.64,9.053 47.634,9.059 v2(48.085,9.51)
CS-ADC: R96.1 U1.C16 | length 20.7
  Top Layer w0.152: U1.C16@52.585,22.01 v2(53.085,22.51) ; R96.1@54.856,40.64 v3(55.118,40.64)
  Signal Layer 1 w0.152: v2(53.085,22.51) 55.982,25.407 55.982,39.776 v3(55.118,40.64)
CS-LF: U1.F16 U9.12 | length 53.2
  Top Layer w0.152: U1.F16@52.585,19.01 v2(53.085,19.51)
  Signal Layer 1 w0.152: v2(53.085,19.51) 57.226,23.651 57.226,57.658 55.749,59.135 55.749,59.167 54.946,59.969 v3(54.915,59.969)
  Bottom Layer w0.152: v2(47.574,62.535) 47.577,62.532 47.577,60.856 48.412,60.02 54.864,60.02 v3(54.915,59.969)
CS-MAX2871: R114.2 U1.M16 | length 97.2
  Top Layer w0.152: U1.M16@52.641,12.954 U1.M16@52.585,13.01 54.757,13.01 v3(54.839,12.929)
  Signal Layer 1 w0.152: v3(54.839,12.929) 59.868,17.958 59.868,20.932 69.85,30.914 69.85,47.295 72.339,49.784 72.339,82.705 72.593,82.959 72.593,94.164 71.765,94.992 70.997,94.992 v3(70.968,95.021)
  Bottom Layer w0.152: R114.2@67.056,94.107 67.793,94.844 70.79,94.844 v3(70.968,95.021)
DATA: U1.P10 U8.2 U24.32 | length 32.7
  Top Layer w0.152: U24.32@33.077,13.002 36.274,13.002 36.525,12.751 v3(36.525,12.09) ; U1.P10@46.585,11.01 v2(47.085,10.51) ; v3(54.407,2.921) 54.508,3.023 U8.2@54.994,3.023
  Signal Layer 1 w0.152: v3(54.153,11.024) 54.284,10.893 54.284,3.044 v3(54.407,2.921)
  Bottom Layer w0.152: v3(36.525,12.09) 36.525,11.374 36.906,10.993 46.602,10.993 v2(47.085,10.51) 47.573,10.998 47.701,10.998 47.707,10.993 54.082,10.993 v3@54.153,10.922
DETO: C95.2 C130.2 U25.10 U25.11 | length 3.3
  Top Layer w0.254: U25.11@46.255,91.761 46.255,92.289 C130.2@45.735,92.809 C95.2@46.751,92.809 ; U25.10@46.755,91.761 C95.2@46.755,92.805
DONE: R43.1 U1.P13 U24.29 | length 23.5
  Top Layer w0.152: U24.29@33.077,11.502 33.077,11.524 35.019,11.524 35.052,11.557 v3(35.052,11.811) ; R43.1@49.779,6.99 49.039,7.73 49.039,10.464 U1.P13@49.585,11.01 v2(50.085,10.51)
  Bottom Layer w0.152: v3(35.052,11.811) 36.87,9.993 49.568,9.993 v2(50.085,10.51)
FE1: R65.1 R69.2 U1.H16 | length 128.2
  Top Layer w0.152: U1.H16@52.585,17.01 v2(53.085,17.51)
  Signal Layer 1 w0.152: v2(53.085,17.51) 54.295,17.51 57.48,20.695 57.48,21.706 60.96,25.186 60.96,86.893 60.808,87.046 v3(60.808,87.325)
  Bottom Layer w0.152: R65.1@7.884,85.69 19.828,85.69 21.414,87.276 21.466,87.224 60.427,87.224 60.528,87.325 v3(60.808,87.325)
FE2: R55.2 R68.2 U1.H15 | length 128.3
  Top Layer w0.152: U1.H15@51.585,17.01 v2(52.085,17.51)
  Signal Layer 1 w0.152: v2(52.085,17.51) 52.628,18.053 54.443,18.053 57.201,20.811 57.201,21.821 60.681,25.301 60.681,86.778 60.249,87.209 60.249,87.441 60.412,87.605 60.427,87.605 v2(60.427,87.865)
  Bottom Layer w0.152: R55.2@11.694,86.444 12.936,86.444 16.816,90.324 21.414,90.324 22.227,91.137 24.362,91.137 27.97,87.528 60.09,87.528 v2(60.427,87.865)
FE3: R13.2 R57.1 R63.2 R95.2 U1.G16 | length 129.5
  Top Layer w0.152: U1.G16@52.585,18.01 v2(53.085,18.51)
  Signal Layer 1 w0.152: v2(29.972,88.798) 29.997,88.773 v2(29.997,85.573) ; v2(53.085,18.51) 53.129,18.466 54.46,18.466 56.871,20.876 56.871,21.886 60.401,25.417 60.401,81.585 57.252,84.734 v2(55.016,84.734)
  Bottom Layer w0.152: R57.1@11.694,89.23 14.058,91.594 ; v2(13.284,92.278) 13.374,92.278 14.058,91.594 ; v2(19.482,94.691) 19.482,91.594 ; v2(29.972,88.798) 29.159,87.986 27.908,87.986 24.3,91.594 R63.2@23.973,91.594 19.482,91.594 ; v2(29.997,85.573) 29.997,84.761 30.862,83.897 36.188,83.897 37.152,84.861 54.889,84.861 v2(55.016,84.734) ; 14.058,91.594 19.482,91.594
FLASH_CS: U1.T3 U8.1 | length 20.8
  Top Layer w0.152: U1.T3@39.585,9.01 v2(39.085,8.51) 39.746,7.849 43.129,7.849 44.069,6.909 44.069,5.766 45.136,4.699 46.787,4.699 47.625,3.861 v3(47.625,1.905)
  Bottom Layer w0.152: v3(47.625,1.905) 54.585,1.905 v3(54.61,1.93)
FLASH_DI: U1.T10 U8.5 | length 5
  Top Layer w0.152: U1.T10@46.585,9.01 v2(47.085,8.51) ; v3(48.082,5.563) U8.5@48.994,5.563
  Signal Layer 1 w0.152: v2(47.085,8.51) 47.701,7.894 48.082,7.513 v3(48.082,5.563)
FPGA_CLK: U1.H4 U24.67 | length 26.5
  Top Layer w0.152: U24.67@23.527,23.552 23.527,24.622 24.356,25.451 32.384,25.451 32.943,24.892 33.349,24.486 v3(34.417,24.486) ; v2(40.085,17.51) U1.H4@40.585,17.01
  Signal Layer 1 w0.152: v3(34.417,24.486) 34.417,24.892 34.518,24.993 39.285,24.993 39.602,24.675 39.602,17.993 v2(40.085,17.51)
FPGA_CLK2: U1.J4 U24.68 | length 29.9
  Top Layer w0.152: U24.68@23.027,23.552 23.027,24.622 24.161,25.756 32.511,25.756 32.866,25.4 v3(33.401,25.4) ; v2(40.085,15.51) U1.J4@40.585,16.01
  Signal Layer 1 w0.152: v3(39.751,25.4) 39.877,25.4 40.568,24.71 40.568,15.993 v2(40.085,15.51)
  Bottom Layer w0.152: v3(33.401,25.4) 33.43,25.371 34.923,25.371 34.94,25.353 35.316,25.353 35.333,25.371 39.849,25.371 39.878,25.4 v3(39.751,25.4)
FPGA_IO0: U1.H2 U24.97 | length 23.3
  Top Layer w0.152: U24.97@17.977,11.502 19.452,11.502 v3(19.609,11.659) ; v2(38.085,17.51) U1.H2@38.585,17.01
  Bottom Layer w0.152: v3(19.609,11.659) 24.317,11.659 26.091,13.433 26.641,13.433 29.718,16.51 37.085,16.51 v2(38.085,17.51)
FPGA_IO1: U1.J1 U24.98 | length 24.3
  Top Layer w0.152: U24.98@17.977,11.002 17.981,10.998 v3(19.228,10.998) ; v2(37.085,15.51) U1.J1@37.585,16.01
  Signal Layer 1 w0.152: v3(31.598,11.176) v3(31.598,15.545)
  Bottom Layer w0.152: v3(19.228,10.998) 31.42,10.998 v3(31.598,11.176) ; v3(31.598,15.545) 31.632,15.51 v2(37.085,15.51)
FPGA_IO2: U1.J3 U24.1 | length 24
  Top Layer w0.152: U24.1@19.527,8.452 19.527,9.875 22.606,12.954 v3(26.797,12.954) ; v2(39.085,15.51) U1.J3@39.585,16.01
  Bottom Layer w0.152: v3(26.797,12.954) 28.829,14.986 36.878,14.986 36.885,14.993 37.285,14.993 37.291,14.986 37.878,14.986 37.885,14.993 38.568,14.993 v2(39.085,15.51)
FPGA_IO3: U1.K1 U24.2 | length 21.1
  Top Layer w0.152: U24.2@20.027,8.452 20.027,9.867 22.606,12.446 v3(25.781,12.446) ; v2(37.085,14.51) U1.K1@37.585,15.01
  Bottom Layer w0.152: v3(25.781,12.446) 25.81,12.475 26.995,12.475 29.03,14.51 v2(37.085,14.51)
FPGA_IO4: U1.K2 U24.3 | length 22.1
  Top Layer w0.152: U24.3@20.527,8.452 20.527,9.859 22.606,11.938 22.809,12.141 25.409,12.141 25.583,11.967 25.979,11.967 26.26,12.248 26.26,12.319 v3(28.296,12.319) ; v2(38.085,14.51) U1.K2@38.585,15.01
  Bottom Layer w0.152: v3(28.296,12.319) 28.296,12.929 29.394,14.027 37.285,14.027 37.767,14.51 v2(38.085,14.51)
FPGA_IO5: U1.L1 U24.4 | length 19.7
  Top Layer w0.152: U24.4@21.027,8.452 21.027,9.851 22.733,11.557 27.601,11.557 v3(28.321,11.557) ; v2(37.085,13.51) U1.L1@37.585,14.01
  Bottom Layer w0.152: v3(28.321,11.557) 30.274,13.51 v2(37.085,13.51)
FPGA_IO6: U1.L3 U24.5 | length 21.2
  Top Layer w0.152: U24.5@21.527,8.452 21.527,9.843 22.682,10.998 28.439,10.998 28.804,11.363 28.804,11.379 28.956,11.532 v3(29.515,11.532) ; v2(39.085,13.51) U1.L3@39.585,14.01
  Bottom Layer w0.152: v3(29.515,11.532) 30.074,11.532 31.569,13.027 38.285,13.027 38.288,13.03 38.474,13.03 38.954,13.51 v2(39.085,13.51)
FPGA_IO7: U1.H1 U24.38 | length 5.3
  Top Layer w0.152: U24.38@33.077,16.002 35.577,16.002 v2(37.085,17.51) U1.H1@37.585,17.01
FPGA_IO8: U1.G1 U24.39 | length 5.5
  Top Layer w0.152: U24.39@33.077,16.502 35.077,16.502 v2(37.085,18.51) U1.G1@37.585,18.01
FPGA_IO9: U1.F2 U24.40 | length 6.8
  Top Layer w0.152: U24.40@33.077,17.002 34.782,17.002 v3(34.798,17.018) ; v2(38.085,19.51) U1.F2@38.585,19.01
  Signal Layer 1 w0.152: v3(34.798,17.018) 34.967,17.018 36.547,18.598 36.547,18.654 36.92,19.027 37.285,19.027 37.767,19.51 v2(38.085,19.51)
FPGA_IO10: U1.F1 U24.41 | length 5.9
  Top Layer w0.152: U24.41@33.077,17.502 35.451,17.502 36.576,18.627 36.576,19.304 36.782,19.51 v2(37.085,19.51) U1.F1@37.585,19.01
FPGA_IO11: U1.E2 U24.42 | length 7.1
  Top Layer w0.152: U24.42@33.077,18.002 35.274,18.002 v3(36.068,18.796) ; v2(38.085,20.51) U1.E2@38.585,20.01
  Bottom Layer w0.152: v3(36.068,18.796) 36.068,19.304 36.757,19.993 37.568,19.993 v2(38.085,20.51)
FPGA_IO12: U1.E1 U24.43 | length 5.6
  Top Layer w0.152: U24.43@33.077,18.502 33.077,18.444 34.996,18.444 37.062,20.51 v2(37.085,20.51) U1.E1@37.585,20.01
FPGA_IO13: U1.C2 U24.44 | length 7.9
  Top Layer w0.152: U24.44@33.077,19.002 34.75,19.002 34.798,19.05 v3(34.798,18.923) ; v2(38.085,22.51) U1.C2@38.585,22.01
  Bottom Layer w0.152: v3(34.798,18.923) 34.798,19.939 36.852,21.993 37.568,21.993 v2(38.085,22.51)
FPGA_IO14: U1.D1 U24.45 | length 5.5
  Top Layer w0.152: U24.45@33.077,19.502 35.077,19.502 v2(37.085,21.51) U1.D1@37.585,21.01
FPGA_IO15: U1.C1 U24.46 | length 5.8
  Top Layer w0.152: U24.46@33.077,20.002 34.577,20.002 v2(37.085,22.51) U1.C1@37.585,22.01
FPGA_MCLK: U1.H3 U24.66 | length 23.5
  Top Layer w0.152: U24.66@24.027,23.552 24.027,24.662 24.511,25.146 32.258,25.146 33.198,24.206 33.833,24.206 34.163,23.876 v3(35.077,23.876) ; v2(39.085,17.51) U1.H3@39.585,17.01
  Signal Layer 1 w0.152: v3@35.204,24.003 38.274,24.003 38.568,23.71 38.568,18.027 v2(39.085,17.51)